# EAGLE board master_schematic_basic4 (EAGLE 7.2.0)
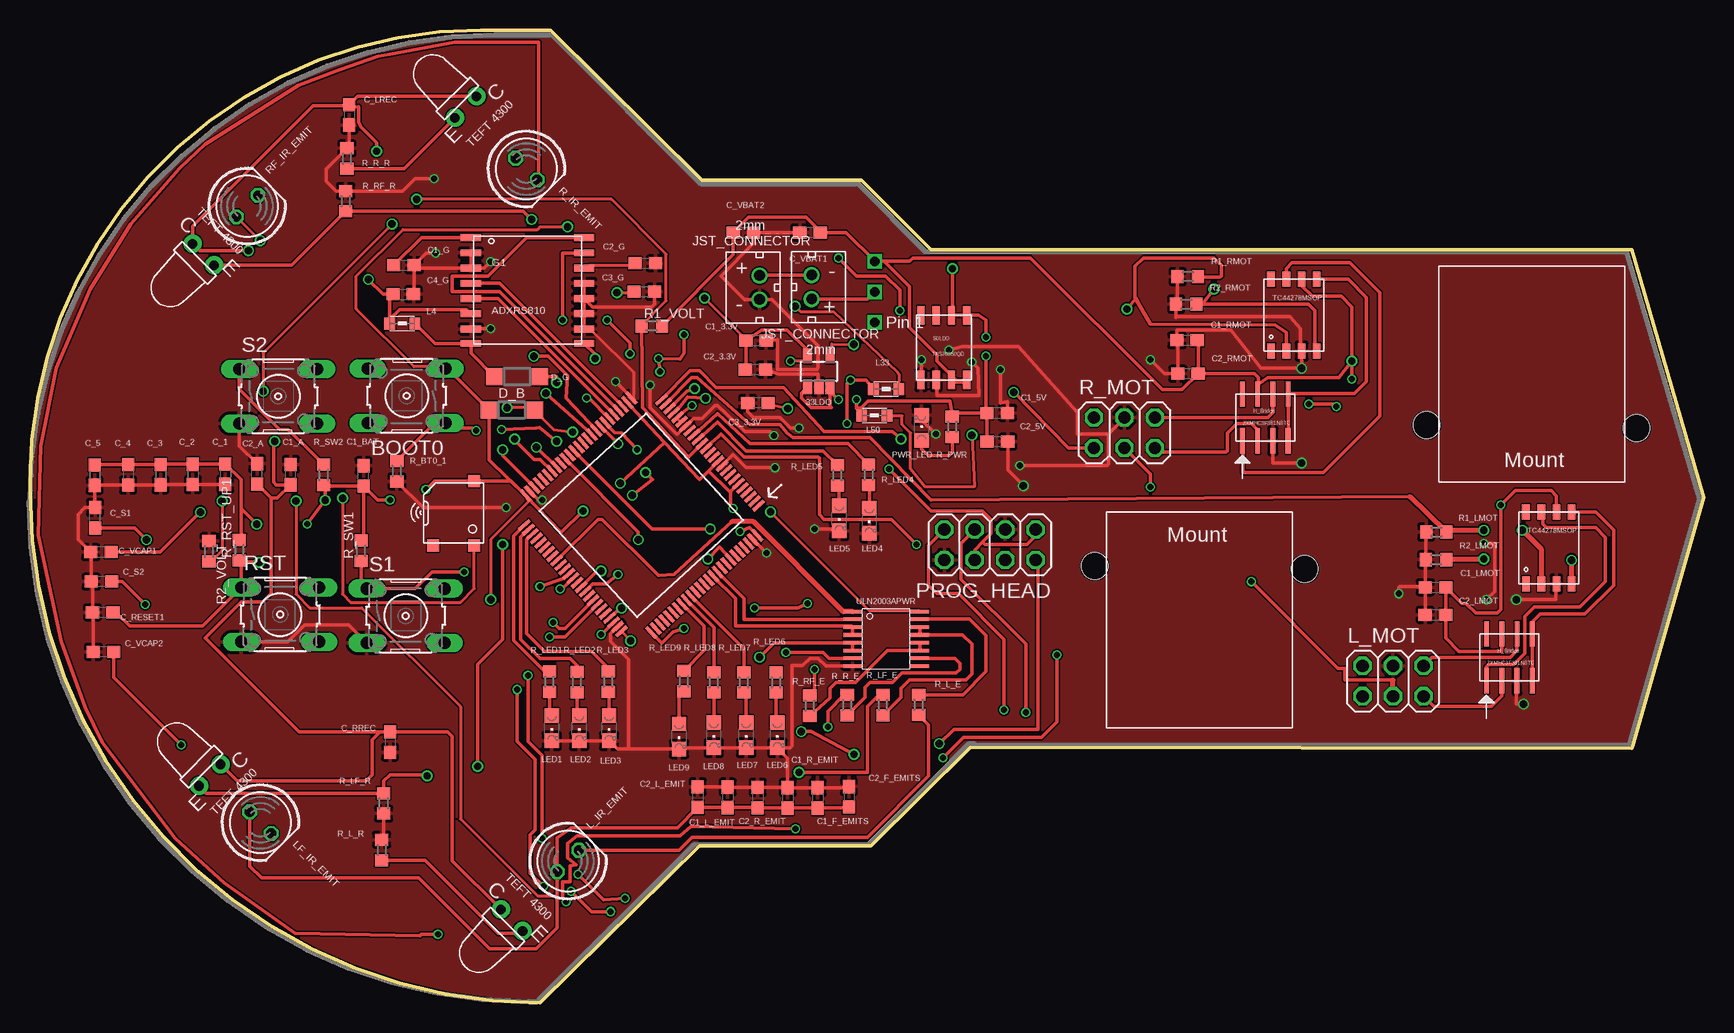
[diagram p0: board, top side]
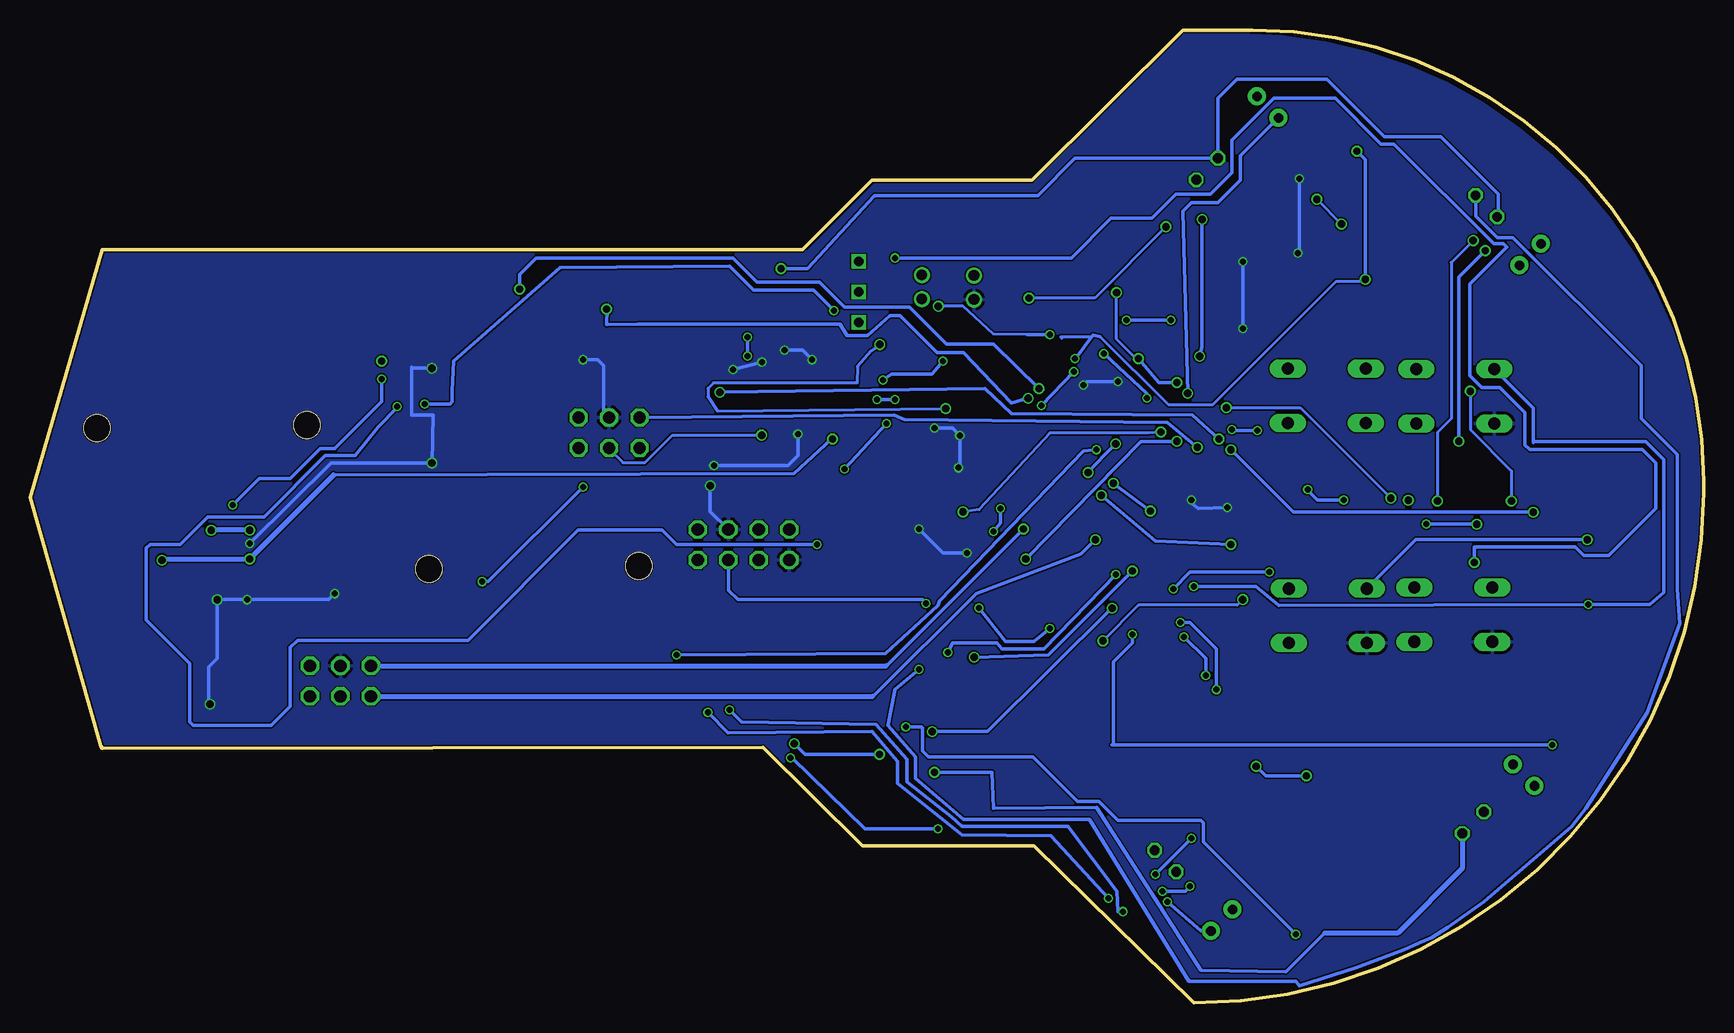
[diagram p1: board, bottom side, seen from below]

Size 139.5 x 81.1 mm. Coordinates in mm from the lower left corner, seen from the top.
Outline: 0,43.5 arc-90 37.6,81.1 43.4,81.1 56,68.6
Outline: 56.1,68.6 69.3,68.6 75.1,62.8 133.5,62.8 139.5,42.1 133.6,21.4 133.5,21.2 78.4,21.3 70.1,13.1 55.8,13.1 42.5,0 arc-90 0,42.5 0,43.6
Copper layers (1*16): Top 0.035mm / dielectric 1.5mm / Bottom 0.035mm
Design rules "default *": minimum track width 10mil, minimum drill 24mil, track to track 5mil, track to pad 5mil, pad to pad 5mil, via to via 5mil, smd to smd 5mil, copper to edge 5mil, drill to drill 5mil, minimum pad ring 5mil, minimum via ring 5mil, stop-mask expansion 4mil, vias tented up to drill 5mil, thermal gap 10mil

## Footprints (pad centres in the part's own frame; a part is rotated, then mirrored left to right if it is on the bottom)
SOT23-DBV = smd 0.75 x 1.2: 1 -0.95,-1.3; 2 0,-1.3; 3 0.95,-1.3; 4 0.95,1.3; 5 -0.95,1.3
8-SOIC(SMT) = smd 0.6 x 1.55: EN -0.635,-2.7; GND -1.905,-2.7; IN1 0.635,-2.7; IN2 1.905,-2.7; NC -0.635,2.7; OUT1 1.905,2.7; OUT2 0.635,2.7; PG -1.905,2.7
B3F-10XX = drill 1.016 long: 1 -3.251,2.261; 2 3.251,2.261; 3 -3.251,-2.261; 4 3.251,-2.261
C0603 = smd 1.1 x 1: 1 -0.85,0; 2 0.85,0
SOD123 = smd 1.4 x 1.4: A 1.9,0; C -1.9,0
SOIC-16 = smd 1.691 x 0.572: 1 -4.72,4.39; 2 -4.72,3.12; 3 -4.72,1.85; 4 -4.72,0.58; 5 -4.72,-0.69; 6 -4.72,-1.96; 7 -4.72,-3.23; 8 -4.72,-4.43; 9 4.72,-4.43; 10 4.72,-3.23; 11 4.72,-1.96; 12 4.72,-0.69; 13 4.72,0.58; 14 4.72,1.85; 15 4.72,3.12; 16 4.72,4.39
8-SOIC = smd 0.4 x 2.1: N1D/P1D -0.635,-1.95; N1G -1.905,-1.95; N2D/P2D 0.635,1.95; P1G -1.905,1.95; P1S/PS2 -0.635,1.95; P2G 1.905,1.95 | smd 0.42 x 2.1: N1S/N2S 0.635,-1.95; N2G 1.905,-1.95
WE-MI_0805 = smd 0.9 x 1: 1 -1.05,0; 2 1.05,0
LED5MM = drill 0.813 octagon: A -1.27,0; K 1.27,0
2X03 = drill 1.016 octagon: 1 -2.54,-1.27; 2 -2.54,1.27; 3 0,-1.27; 4 0,1.27; 5 2.54,-1.27; 6 2.54,1.27
RECEIVER = drill 0.8 pad 1.5: C 1.27,-0.5; E -1.27,-0.5
CHIPLED_0805 = smd 1.2 x 1.2: A 0,-1.05; C 0,1.05
TC44278MSOP = smd 0.635 x 1.27: GND 0.635,-3; IN_A -0.635,-3; IN_B 1.905,-3; NC1 -1.905,-3; OUT_A -0.635,3; OUT_B 1.905,3; VDD 0.635,3 | smd 0.66 x 1.27: NC2 -1.905,3
2X04 = drill 1.016 octagon: 1 -3.81,-1.27; 2 -3.81,1.27; 3 -1.27,-1.27; 4 -1.27,1.27; 5 1.27,-1.27; 6 1.27,1.27; 7 3.81,-1.27; 8 3.81,1.27
T212031 = drill 0.8 square: 1 0,2.54; 2 0,0; 3 0,-2.54
R0603 = smd 1 x 1.1: 1 -0.85,0; 2 0.85,0
SMT-0540-S-R = smd 1 x 1: + 1.7,-2.7; - 1.7,2.7; M -1.7,-2.7
BAT_FOOTPRINT = hole 2.2: -14,9.25; 14,9.25; 13.9,1; -14.15,1; 0,9.5; 0,1
MOTOR_MOUNT = hole 2.2: -9,4.25; 8.5,4
LQFP100 = smd 1.2 x 0.3: 1 -7.75,6; 2 -7.75,5.5; 3 -7.75,5; 4 -7.75,4.5; 5 -7.75,4; 6 -7.75,3.5; 7 -7.75,3; 8 -7.75,2.5; 9 -7.75,2; 10 -7.75,1.5; 11 -7.75,1; 12 -7.75,0.5; 13 -7.75,0; 14 -7.75,-0.5; 15 -7.75,-1; 16 -7.75,-1.5; 17 -7.75,-2; 18 -7.75,-2.5; 19 -7.75,-3; 20 -7.75,-3.5; 21 -7.75,-4; 22 -7.75,-4.5; 23 -7.75,-5; 24 -7.75,-5.5; 25 -7.75,-6; 51 7.75,-6; 52 7.75,-5.5; 53 7.75,-5; 54 7.75,-4.5; 55 7.75,-4; 56 7.75,-3.5; 57 7.75,-3; 58 7.75,-2.5; 59 7.75,-2; 60 7.75,-1.5; 61 7.75,-1; 62 7.75,-0.5; 63 7.75,0; 64 7.75,0.5; 65 7.75,1; 66 7.75,1.5; 67 7.75,2; 68 7.75,2.5; 69 7.75,3; 70 7.75,3.5; 71 7.75,4; 72 7.75,4.5; 73 7.75,5; 74 7.75,5.5; 75 7.75,6 | smd 0.3 x 1.2: 26 -6,-7.75; 27 -5.5,-7.75; 28 -5,-7.75; 29 -4.5,-7.75; 30 -4,-7.75; 31 -3.5,-7.75; 32 -3,-7.75; 33 -2.5,-7.75; 34 -2,-7.75; 35 -1.5,-7.75; 36 -1,-7.75; 37 -0.5,-7.75; 38 0,-7.75; 39 0.5,-7.75; 40 1,-7.75; 41 1.5,-7.75; 42 2,-7.75; 43 2.5,-7.75; 44 3,-7.75; 45 3.5,-7.75; 46 4,-7.75; 47 4.5,-7.75; 48 5,-7.75; 49 5.5,-7.75; 50 6,-7.75; 76 6,7.75; 77 5.5,7.75; 78 5,7.75; 79 4.5,7.75; 80 4,7.75; 81 3.5,7.75; 82 3,7.75; 83 2.5,7.75; 84 2,7.75; 85 1.5,7.75; 86 1,7.75; 87 0.5,7.75; 88 0,7.75; 89 -0.5,7.75; 90 -1,7.75; 91 -1.5,7.75; 92 -2,7.75; 93 -2.5,7.75; 94 -3,7.75; 95 -3.5,7.75; 96 -4,7.75; 97 -4.5,7.75; 98 -5,7.75; 99 -5.5,7.75; 100 -6,7.75
JST_CONNECTOR_FEMALE = drill 0.889: + 0,1; - 0,-1
ULN2003APWR = smd 1.55 x 0.3: 1B -2.8,2.275; 1C 2.8,2.275; 2B -2.8,1.625; 2C 2.8,1.625; 3B -2.8,0.975; 3C 2.8,0.975; 4B -2.8,0.325; 4C 2.8,0.325; 5B -2.8,-0.325; 5C 2.8,-0.325; 6B -2.8,-0.975; 6C 2.8,-0.975; 7B -2.8,-1.625; 7C 2.8,-1.625; COM 2.8,-2.275; GND -2.8,-2.275

## Placement (x,y rotation side)
33LDO  TPS73633DBVR  [SOT23-DBV]  65.75,52.64 0 top
50LDO  TPS76850QD  [8-SOIC(SMT)]  76.18,54.62 0 top
BOOT0  [B3F-10XX]  31.4,50.6 180 top
C1_3.3V  10uF  [C0603]  60.52,55.2 0 top
C1_5V  100uF  [C0603]  80.63,49.18 0 top
C1_A  1uF  [C0603]  21.74,44.03 90 top
C1_BAT  4.7uF  [C0603]  27.8,43.92 90 top
C1_F_EMITS  4.7uF  [C0603]  65.66,17.08 270 top
C1_G  1uF  [C0603]  31.17,61.48 0 top
C1_L_EMIT  4.7uF  [C0603]  58.16,17.12 270 top
C1_LMOT  100uF  [C0603]  117.17,34.64 0 top
C1_R_EMIT  4.7uF  [C0603]  63.16,17.08 270 top
C1_RMOT  100uF  [C0603]  96.45,55.24 0 top
C2_3.3V  .1uF  [C0603]  60.47,52.8 0 top
C2_5V  .1uF  [C0603]  80.65,46.78 0 top
C2_A  100nF  [C0603]  18.92,44.09 90 top
C2_F_EMITS  .1uF  [C0603]  68.26,17.17 270 top
C2_G  1uF  [C0603]  51.29,61.66 0 top
C2_L_EMIT  .1uF  [C0603]  55.66,17.14 270 top
C2_LMOT  .1uF  [C0603]  117.15,32.34 0 top
C2_R_EMIT  .1 uF  [C0603]  60.66,17.1 270 top
C2_RMOT  .1uF  [C0603]  96.53,52.44 0 top
C3_3.3V  100nF  [C0603]  60.68,50 180 top
C3_G  100nF  [C0603]  51.21,59.28 0 top
C4_G  1uF  [C0603]  31.11,59.06 0 top
C_1  100nF  [C0603]  16.28,44.07 270 top
C_2  100nF  [C0603]  13.58,44.05 270 top
C_3  100nF  [C0603]  10.88,44.03 270 top
C_4  100nF  [C0603]  8.18,44.01 270 top
C_5  100nF  [C0603]  5.38,43.99 270 top
C_LREC  0.1uF  [C0603]  26.62,74.03 270 top
C_RESET1  0.1 uF  [C0603]  6.06,32.54 180 top
C_RREC  0.1 uF  [C0603]  30.02,21.73 270 top
C_S1  0.1 uF  [C0603]  5.42,40.43 90 top
C_S2  0.1 uF  [C0603]  5.95,35.12 180 top
C_VBAT1  .1uF  [C0603]  65.02,64.22 180 top
C_VBAT2  100uF  [C0603]  59.47,64.22 0 top
C_VCAP1  2.2uF  [C0603]  5.91,37.56 180 top
C_VCAP2  2.2uF  [C0603]  6.13,29.26 180 top
D_B  25V  [SOD123]  40.15,49.41 0 top
D_G  >24V  [SOD123]  40.6,52.21 180 top
G1  ADXRS810  [SOIC-16]  41.47,59.4 0 top
HB_L  ZXMHC3F381N8TC  [8-SOIC]  123.32,28.8 0 top
HB_R  ZXMHC3F381N8TC  [8-SOIC]  102.97,48.8 0 top
L4  470uH  [WE-MI_0805]  31.04,56.64 0 top
L33  10uH  [WE-MI_0805]  71.36,51.16 0 top
L50  10uH  [WE-MI_0805]  70.38,48.96 0 top
L_IR_EMIT  5mm  [LED5MM]  44.85,11.81 45 top
L_MOT  [2X03]  113.62,26.82 0 top
L_REC  RECEIVER  [RECEIVER]  39.81,6.53 135 top
LED1  [CHIPLED_0805]  43.49,22.89 180 top
LED2  [CHIPLED_0805]  45.78,22.89 180 top
LED3  [CHIPLED_0805]  48.27,22.89 180 top
LED4  [CHIPLED_0805]  69.96,40.19 180 top
LED5  [CHIPLED_0805]  67.45,40.39 180 top
LED6  [CHIPLED_0805]  62.3,22.3 180 top
LED7  [CHIPLED_0805]  59.7,22.3 180 top
LED8  [CHIPLED_0805]  57,22.3 180 top
LED9  [CHIPLED_0805]  54.1,22.2 180 top
LF_IR_EMIT  5mm  [LED5MM]  19.21,15.01 315 top
LF_REC  RECEIVER  [RECEIVER]  14.63,19.33 45 top
MOS_L  TC44278MSOP  [TC44278MSOP]  126.61,37.92 0 top
MOS_R  TC44278MSOP  [TC44278MSOP]  105.36,57.32 0 top
PROG_HEAD  [2X04]  80.02,38.18 180 top
PWR_LED  [CHIPLED_0805]  74.32,47.94 0 top
PWR_SWITCH  T212031  [T212031]  70.43,59.28 180 top
R1_LMOT  47k  [R0603]  117.23,39.24 0 top
R1_RMOT  47k  [R0603]  96.51,60.54 0 top
R1_VOLT  20k  [R0603]  51.82,56.42 0 top
R2_LMOT  47k  [R0603]  117.21,36.94 0 top
R2_RMOT  47k  [R0603]  96.39,58.24 0 top
R2_VOLT  10k  [R0603]  14.92,37.63 270 top
R_BT0_1  47k  [R0603]  30.58,44.32 90 top
R_IR_EMIT  5mm  [LED5MM]  41.38,69.51 315 top
R_L_E  6 ohm  [R0603]  74.08,24.83 270 top
R_L_R  1.8k ohm  [R0603]  29.32,12.73 270 top
R_LED1  1k  [R0603]  43.3,26.77 90 top
R_LED2  1k  [R0603]  45.6,26.72 90 top
R_LED3  1k  [R0603]  48.2,26.77 90 top
R_LED4  1k  [R0603]  69.9,44.02 90 top
R_LED5  1k  [R0603]  67.3,43.97 90 top
R_LED6  1k  [R0603]  62.2,26.7 90 top
R_LED7  1k  [R0603]  59.5,26.7 90 top
R_LED8  1k  [R0603]  57,26.7 90 top
R_LED9  1k  [R0603]  54.5,26.8 90 top
R_LF_E  10 ohm  [R0603]  71.1,24.82 90 top
R_LF_R  1.8k ohm  [R0603]  29.48,16.62 90 top
R_MOT  [2X03]  91.23,47.52 0 top
R_PWR  200 Ohm  [R0603]  76.88,48.02 90 top
R_R_E  6 ohm  [R0603]  68.12,24.81 90 top
R_R_R  1.8k ohm  [R0603]  26.42,70.38 270 top
R_REC  RECEIVER  [RECEIVER]  35.97,75.03 45 top
R_RF_E  10 ohm  [R0603]  65,24.77 90 top
R_RF_R  1.8k ohm  [R0603]  26.32,66.83 270 top
R_RST_UP1  47k  [R0603]  17.44,37.74 90 top
R_SW1  47k  [R0603]  27.6,37.67 90 top
R_SW2  47k  [R0603]  24.48,44.01 270 top
RF_IR_EMIT  5mm  [LED5MM]  18.1,66.42 45 top
RF_REC  RECEIVER  [RECEIVER]  14.09,62.03 135 top
RST  [B3F-10XX]  20.85,32.36 0 top
S1  [B3F-10XX]  31.32,32.26 0 top
S2  [B3F-10XX]  20.69,50.56 0 top
SPK1  SMT-0540-S-R  [SMT-0540-S-R]  35.3,40.81 0 top
U$1  BAT  [BAT_FOOTPRINT]  -34.34,26.29 0 top  (outside the outline)
U$2  MOTOR  [MOTOR_MOUNT]  97.74,32.16 0 top
U$3  STM32F769VG-1  [LQFP100]  50.97,40.63 222.5 top
U$5  MOTOR  [MOTOR_MOUNT]  124.92,52.16 180 top
U$7  JST_CONNECTOR_FEMALE  [JST_CONNECTOR_FEMALE]  65.16,59.67 180 top
U$8  JST_CONNECTOR_FEMALE  [JST_CONNECTOR_FEMALE]  60.81,59.63 0 top
U$9  ULN2003APWR  [ULN2003APWR]  71.37,30.34 0 top

## Library data of the parts
33LDO = TPSRegulators; AVAILABILITY: Good; DESCRIPTION: Single Output LDO, 400mA, Adj.(1.2 to 5.5V), Cap free, Low Noise, Reverse Current Protection 5-SOT-23 -40 to 125; MF: Texas Instruments; MP: TPS73633DBVR; PACKAGE: SOT-23 Texas Instruments; PRICE: 1.34 USD
50LDO = TPSRegulators
BOOT0 RST S1 S2 = switch-omron; MPN: B3F-1000; OC_FARNELL: 176432; OC_NEWARK: 36M3542
C1_3.3V C1_5V C1_F_EMITS C1_L_EMIT C1_R_EMIT C2_3.3V C2_5V C2_F_EMITS C2_L_EMIT C2_R_EMIT C3_3.3V C_LREC C_RESET1 C_RREC C_S1 C_S2 C_VBAT1 C_VBAT2 R1_LMOT R1_RMOT R1_VOLT R2_LMOT R2_RMOT R2_VOLT R_BT0_1 R_L_E R_L_R R_LED1-R_LED9 R_LF_E R_LF_R R_PWR R_R_E R_R_R R_RF_E R_RF_R R_RST_UP1 R_SW1 R_SW2 = resistor
C1_A C1_BAT C1_G C1_LMOT C1_RMOT C2_A C2_G C2_LMOT C2_RMOT C3_G C4_G C_1-C_5 C_VCAP1 C_VCAP2 = rcl
D_B D_G = diode
G1 = gyroscope
HB_L HB_R = MMHbridge
L4 L33 L50 = EagleLibrary_Wuerth_Elektronik_eiSos_rev16a
L_IR_EMIT LED1-LED9 LF_IR_EMIT PWR_LED R_IR_EMIT RF_IR_EMIT = led
L_MOT PROG_HEAD R_MOT = pinhead
L_REC LF_REC R_REC RF_REC = sfh4550 & teft4300
MOS_L MOS_R = MMmosfet
PWR_SWITCH = GCswitch
SPK1 = SMT-0540-S-R; AVAILABILITY: Good; DESCRIPTION: Audio Indicator Transducer Electromagnetic 3Vp-p 100mA Solder Pad 2Vp-p 3500Hz to 4500Hz Surface Mount; MF: PUI Audio; MP: SMT-0540-S-R; PACKAGE: None; PRICE: 2.42 USD
U$1 U$2 U$5 = mounts
U$3 = MCU
U$7 U$8 = JST_CONNECTOR_FEMALE. through hole
U$9 = ULN2003APWR

## Nets
3.3V: 33LDO.5 BOOT0.3 C1_3.3V.1 C1_BAT.1 C2_3.3V.1 C_1.1 C_2.1 C_3.1 C_4.1 C_5.1 D_B.C L33.1 PROG_HEAD.1 PROG_HEAD.6 R_RST_UP1.2 R_SW1.2 R_SW2.2 SPK1.- U$3.6 U$3.11 U$3.27 U$3.50 U$3.75 U$3.100
5V: 33LDO.1 33LDO.3 50LDO.OUT1 50LDO.OUT2 C1_5V.1 C1_F_EMITS.2 C1_L_EMIT.2 C1_R_EMIT.2 C2_5V.1 C2_F_EMITS.2 C2_L_EMIT.2 C2_R_EMIT.2 L50.1 L_IR_EMIT.A LF_IR_EMIT.A R_IR_EMIT.A R_PWR.2 RF_IR_EMIT.A
A3.3V: C1_A.1 C2_A.1 C4_G.1 C_LREC.1 C_RREC.1 G1.6 L4.1 L33.2 L_REC.C LF_REC.C R_REC.C RF_REC.C U$3.20 U$3.21
A5.0V: L50.2 L_MOT.3 R_MOT.3
BOOT0: BOOT0.1 R_BT0_1.2 U$3.94
BUZZER: U$3.59 U$9.1B
G_CS: G1.4 U$3.28
G_MISO: G1.5 U$3.30
G_MOSI: G1.15 U$3.31
G_SCLK: G1.16 U$3.29
GND: 33LDO.2 50LDO.EN 50LDO.GND C1_3.3V.2 C1_5V.2 C1_A.2 C1_BAT.2 C1_F_EMITS.1 C1_G.2 C1_L_EMIT.1 C1_LMOT.1 C1_R_EMIT.1 C1_RMOT.1 C2_3.3V.2 C2_5V.2 C2_A.2 C2_F_EMITS.1 C2_G.2 C2_L_EMIT.1 C2_LMOT.1 C2_R_EMIT.1 C2_RMOT.1 C3_3.3V.2 C3_G.2 C4_G.2 C_1.2 C_2.2 C_3.2 C_4.2 C_5.2 C_LREC.2 C_RESET1.2 C_RREC.2 C_S1.2 C_S2.2 C_VBAT1.2 C_VBAT2.2 C_VCAP1.2 C_VCAP2.2 G1.2 G1.3 G1.7 G1.10 G1.11 G1.12 G1.13 HB_L.N1S/N2S HB_R.N1S/N2S L_MOT.4 LED1.C LED2.C LED3.C LED4.C LED5.C LED6.C LED7.C LED8.C LED9.C MOS_L.GND MOS_R.GND PROG_HEAD.3 PROG_HEAD.8 PWR_LED.C R1_LMOT.1 R1_RMOT.1 R2_LMOT.1 R2_RMOT.1 R2_VOLT.1 R_BT0_1.1 R_L_R.1 R_LF_R.1 R_MOT.4 R_R_R.1 R_RF_R.1 RST.3 S1.3 S2.3 U$3.10 U$3.19 U$3.26 U$3.49 U$3.74 U$3.99 U$8.- U$9.GND
L_EMITTER: U$3.65 U$9.5B U$9.6B
LED1: R_LED1.2 U$3.51
LED2: R_LED2.2 U$3.52
LED3: R_LED3.2 U$3.53
LED4: R_LED4.2 U$3.17
LED5: R_LED5.2 U$3.16
LED6: R_LED6.2
LED7: R_LED7.2 U$3.85
LED8: R_LED8.2 U$3.84
LED9: R_LED9.2 U$3.83
LEFT_REC: L_REC.E R_L_R.2 U$3.32
LENCA: L_MOT.1 U$3.41
LENCB: L_MOT.2 U$3.39
LF_EMITTER: U$3.66 U$9.7B
LF_REC: LF_REC.E R_LF_R.2 U$3.33
LPWMA: MOS_L.IN_A R1_LMOT.2 U$3.24
LPWMB: MOS_L.IN_B R2_LMOT.2 U$3.25
N$1: PWR_LED.A R_PWR.1
N$2: 33LDO.4 C3_3.3V.1
N$3: LED6.A R_LED6.1
N$4: R_L_E.1 U$9.2C
N$5: HB_L.N1G MOS_L.OUT_A
N$6: HB_L.N2G HB_L.P2G MOS_L.OUT_B
N$7: LED7.A R_LED7.1
N$8: HB_L.N1D/P1D L_MOT.5
N$9: U$7.- U$8.+
N$10: C1_G.1 G1.1
N$11: HB_L.N2D/P2D L_MOT.6
N$12: LED8.A R_LED8.1
N$13: R_R_E.1 U$9.7C
N$14: D_G.A G1.8 L4.2
N$15: LED9.A R_LED9.1
N$17: HB_R.N1G MOS_R.OUT_A
N$18: HB_R.N2G HB_R.P2G MOS_R.OUT_B
N$19: HB_R.N1D/P1D R_MOT.5
N$20: C3_G.1 D_G.C G1.9
N$21: HB_R.N2D/P2D R_MOT.6
N$23: R_RF_E.2 RF_IR_EMIT.K
N$24: R_LF_E.1 U$9.3C U$9.4C
N$25: R_IR_EMIT.K R_R_E.2
N$26: L_IR_EMIT.K R_L_E.2
N$27: R_RF_E.1 U$9.5C U$9.6C
N$28: LF_IR_EMIT.K R_LF_E.2
N$29: D_B.A SPK1.+ U$9.1C
N$31: PWR_SWITCH.2 U$7.+
N$35: C2_G.1 G1.14
N$40: LED1.A R_LED1.1
N$41: LED2.A R_LED2.1
N$42: LED3.A R_LED3.1
N$43: LED4.A R_LED4.1
N$44: LED5.A R_LED5.1
N$56: C_VCAP2.1 U$3.73
N$57: C_VCAP1.1 U$3.48
R_EMITTER: U$3.90 U$9.3B U$9.4B
RENCA: R_MOT.1 U$3.44
RENCB: R_MOT.2 U$3.43
RESET: C_RESET1.1 R_RST_UP1.1 RST.1 U$3.14
RF_EMITTER: U$3.91 U$9.2B
RF_REC: R_RF_R.2 RF_REC.E U$3.34
RIGHT_REC: R_R_R.2 R_REC.E U$3.35
RPWMA: MOS_R.IN_A R1_RMOT.2 U$3.22
RPWMB: MOS_R.IN_B R2_RMOT.2 U$3.23
RX: PROG_HEAD.5 U$3.69
SW1: C_S1.1 R_SW1.1 S1.1 U$3.63
SW2: C_S2.1 R_SW2.1 S2.1 U$3.62
SWCLK: PROG_HEAD.4 U$3.76
SWDIO: PROG_HEAD.2 U$3.72
TX: PROG_HEAD.7 U$3.68
V_BAT: 50LDO.IN1 50LDO.IN2 C1_LMOT.2 C1_RMOT.2 C2_LMOT.2 C2_RMOT.2 C_VBAT1.1 C_VBAT2.1 HB_L.P1S/PS2 HB_R.P1S/PS2 MOS_L.VDD MOS_R.VDD PWR_SWITCH.3 R1_VOLT.2
VOLTMETER: R1_VOLT.1 R2_VOLT.2 U$3.15

## Tracks (layer width: path | path; a pad name or v marks a point on that pad's centre or on a via)
3.3V  (via drill 0.5, 0.6, 0.61)
  Top 0.254: v50.06,30.18 49.38,30.86 U$3.75 | v38.41,33.6 38.41,38.63 41.61,41.84 U$3.50 | v56.24,58.75 59.66,55.32 C1_3.3V.1 | v44.81,64.69 42.52,64.69 42.29,64.47 31.09,64.47 27.2,60.58 27.2,57.84 32.01,53.04 34.52,53.04 BOOT0.3
  Top 0.305: U$3.50 40.09,43.51 SPK1.- 33.71,43.51 v33,42.8 | U$3.50 38.25,45.25 D_B.C 34.8,52.86 BOOT0.3 | C_5.1 5.4,44.86 C_4.1 10.86,44.86 C_3.1 10.9,44.9 C_2.1 13.6,44.92 C_1.1 17.6,43.6 17.6,41.2 | C2_3.3V.1 59.67,52.55 C1_3.3V.1 60.97,56.1 63.1,56.1 64.8,54.4 33LDO.5 64.9,54.04 | 17.6,41.2 17.6,38.75 R_RST_UP1.2 | U$3.50 44.29,39.19 v46.1,41 | v49.2,43.3 52.9,46.7 | 17.6,41.2 v18.9,39.9 | C1_BAT.1 27.8,38.72 R_SW1.2 | C1_BAT.1 24.57,43.07 R_SW2.2 24.6,43.04 v24.6,41.9 v23.1,39.9 | U$3.27 50.54,49.26 52.9,46.7 | 52.9,46.7 55.8,43.6 56.23,44 56.57,44.34 | 56.57,44.34 U$3.11 | 64.9,54.04 64.9,54.1 | C1_BAT.1 28.97,41.9 v30,41.9 | PROG_HEAD.6 78.75,37.75 79.4,38.4 | 79.4,38.4 80.1,39.1 80.1,40.3 79.4,41 75.1,41 v71.6,44.5 | v68.1,48.3 68.1,51.6 v68.4,51.9 69.67,51.9 L33.1 | U$3.6 59.05,43.25 58.4,42.6 | 58.4,42.6 58.3,42.6 56.57,44.34 | 58.4,42.6 58.4,41.4 v58.6,41.2 | v59.2,39.3 60,39.6 U$3.100 | 64.9,54.04 64.94,53.54 v63.4,53.5 | PROG_HEAD.1 83.83,38.93 83.1,38.2 79.6,38.2 79.4,38.4
  Bottom 0.254: v50.06,30.18 47.09,33.15 38.86,33.15 v38.41,33.6 | v56.24,58.75 50.75,58.75 v44.81,64.69
  Bottom 0.305: v46.1,41 v49.2,43.3 | v18.9,39.9 v23.1,39.9 | v30,41.9 32.2,41.9 33,42.7 v33,42.8 | v71.6,44.5 v68.1,48.3 | v58.6,41.2 58.6,40 v59.2,39.3 | v63.4,53.5 64.3,52.4 67.7,52.4 v68.4,51.9
5V  (via drill 0.5, 0.6, 0.61)
  Top 0.254: 43.95,8.92 42.29,8.92 35.89,15.32 35.89,24.69 27.66,32.92 23.32,32.92 22.17,34.06 v22.17,41.84 | v19.2,63.55 17.37,65.38 RF_IR_EMIT.A
  Top 0.305: LF_IR_EMIT.A 18.31,11.39 19.3,10.4 32.4,10.4 38.3,4.5 42.2,4.5 43.95,6.25 43.95,8.92 L_IR_EMIT.A 43.95,13.75 45.1,14.6 53.97,14.6 C2_L_EMIT.2 58.14,16.29 C1_L_EMIT.2 60.64,16.27 C2_R_EMIT.2 63.14,16.25 C1_R_EMIT.2 C1_F_EMITS.2 68.17,16.23 C2_F_EMITS.2 | 79.7,49.46 C1_5V.1 | C1_5V.1 77.19,49.18 R_PWR.2 76.7,50.15 69.84,50.15 69.31,49.61 | C1_5V.1 79.78,46.8 C2_5V.1 | 69.31,49.61 L50.1 | v76.9,61.2 76.9,57.41 50LDO.OUT2 50LDO.OUT1 79.08,57.32 79.7,56.9 v79.7,55.5 | 33LDO.1 64.3,50.84 64.3,50.4 65.1,49.6 66.8,49.6 66.7,49.7 33LDO.3 66.7,50.9 v67.4,50.3 | v68.9,50.3 68.9,49.52 69.31,49.61 | v79.7,53.9 79.7,49.26 C1_5V.1
  Bottom 0.254: v22.17,41.84 22.17,47.55 21.03,48.69 21.03,61.72 v19.2,63.55
  Bottom 0.305: RF_IR_EMIT.A 17.1,65.62 17.1,67.4 21.9,72.2 26.6,72.2 31.4,77 38.9,77 40.48,75.42 R_IR_EMIT.A 52.39,70.41 55.5,67.3 69.1,67.3 74.7,61.2 v76.9,61.2 | v67.4,50.3 v68.9,50.3 | v79.7,55.5 v79.7,53.9
A3.3V  (via drill 0.5, 0.6, 0.61)
  Top 0.254: U$3.21 53.95,48.69 54.18,48.46 U$3.20 | v63.78,58.06 64.24,57.61 66.98,57.61 72.32,52.56 72.42,52.41 L33.2
  Top 0.305: L_REC.C 35.2,11.85 35.2,22.2 34.82,22.58 C_RREC.1 29.18,22.58 | LF_REC.C 17.26,18.5 28,18.5 28.5,19 28.5,21.9 29.18,22.58 | R_REC.C 27.31,75.57 C_LREC.1 26.54,74.8 | 26.54,74.8 23.6,74.8 13.55,64.75 RF_REC.C 14.13,62.7 v18.2,62.7 | 26.54,74.8 26.7,74.64 27.4,74.7 27.4,73.4 27.6,73 28.9,71.7 v28.9,71 | G1.6 36.39,57.8 30.8,57.8 29.99,56.99 L4.1 29.99,58.79 C4_G.1 29.44,59.06 v28.2,60.3 | 29.18,22.58 22.42,22.58 14.6,30.4 17.6,33.4 19.4,33.4 20.1,34.1 20.1,42.06 | 20.1,42.06 C2_A.1 | 20.1,42.06 20.62,42.06 C1_A.1 20.52,43.18 20.3,43.4 20.3,46.7 v20.4,46.8 | U$3.21 54.41,49.22 v55.2,49.8 | v52.5,52.6 v52.4,53.7 54.2,53.65 54.5,54.15 v54.5,55.7
  Bottom 0.254: v63.78,58.06 61.72,58.06 59.21,55.75 56.4,55.7 | 50.9,55.65 51.05,55.5 53.6,55.5 53.5,55.4 | 50.29,55.55 44.58,49.84 40.92,49.84 30.63,60.12 28.35,60.12 v28.2,60.3
  Bottom 0.305: v28.2,60.3 28.2,70.3 v28.9,71 | v20.4,46.8 20.4,60.5 v18.2,62.7 | v55.2,49.8 v52.5,52.6 | 50.29,55.55 50.9,55.65 52.3,53.75 52.55,53.75 v52.4,53.7 | 56.4,55.7 v54.5,55.7
A5.0V  (via drill 0.5, 0.61)
  Top 0.254: v78.51,47.32 78.72,43.01 74.61,43.01 73.4,44.5 73.4,47.5 72.7,48.2 72.7,48.92 71.55,48.92 L50.2
  Top 0.305: 113.6,26.9 109.6,26.9 109.6,27.88 109.02,27.88 v101.8,35.1 | v93.4,43 93.4,44.08 R_MOT.3
  Top 0.406: L_MOT.3 113.62,26.88 113.6,26.9
  Bottom 0.254: v78.51,47.32 85.95,47.32 88.24,45.03 90.07,45.03 91.21,46.18 R_MOT.3
  Bottom 0.305: v101.8,35.1 101.3,35.1 v93.4,43
BOOT0  (via drill 0.5, 0.6)
  Top 0.305: R_BT0_1.2 33.75,48.34 BOOT0.1 35.09,47.9 36.9,47.9 v37.2,47.7 | v43.9,46.8 42.46,47.94 42.2,47.9 v39.3,47.8 | v56.5,37 57.46,38 U$3.94
  Bottom 0.305: v43.9,46.8 46.9,46.8 v56.5,37 | v37.2,47.7 39,47.7 v39.3,47.8
BUZZER
  Top 0.305: 58.5,40.1 53.7,35.7 52.4,35.6 47.7,40.3 47.34,40.3 U$3.59
  Top 0.406: U$9.1B 67.78,32.62 60.3,40.1 58.5,40.1
G_CS
  Top 0.305: G1.4 39.16,59.98 U$3.28
G_MISO
  Top 0.305: U$3.30 39.02,58.71 G1.5
G_MOSI  (via drill 0.5)
  Top 0.305: U$3.31 48.29,48.71 46.6,50.4 v46.4,50.4 | v50,54.1 50,55 v48.1,56.9 | v44.4,56.9 44.4,62.5 46.17,62.5 G1.15
  Bottom 0.305: v46.4,50.4 46.4,50.8 v50,54.1 | v48.1,56.9 v44.4,56.9
G_SCLK
  Top 0.305: U$3.29 39.14,59.3 35.2,59.3 35.2,60.6 38.2,60.6 41.39,63.79 G1.16
GND  (via drill 0.5, 0.6)
  Top 0.254: U$3.26 50.29,50.29 50.29,52.58 46.86,56.01 46.41,56.01 G1.10
  Top 0.305: C2_LMOT.1 116.3,34.62 C1_LMOT.1 | C1_LMOT.1 116.32,36.9 R2_LMOT.1 116.36,39.22 R1_LMOT.1 | R_L_R.1 29.48,13.74 R_LF_R.1 | C_VCAP2.2 5.28,32.47 C_RESET1.2 5.21,35.01 C_S2.2 5.1,37.52 C_VCAP1.2 4,38.62 4,40.7 4.58,41.28 C_S1.2 5.38,41.32 C_5.2 5.4,43.16 C_4.2 8.2,43.18 C_3.2 10.9,43.2 C_2.2 | C_2.2 13.6,43.22 C_1.2 | G1.13 G1.12 | G1.12 G1.11 G1.10 | G1.12 46.9,58 51.8,58 52.06,58.26 C3_G.2 | C_LREC.2 26.62,71.43 R_R_R.1 24.7,69.51 24.7,68.5 25.52,67.68 R_RF_R.1 31.08,67.68 32.1,68.7 v33.7,68.7 | C_2.2 13.5,43.28 13.5,43.3 | C2_A.2 17.44,46.42 S2.3 | C1_G.2 32.02,59.12 C4_G.2 | C1_G.2 32.25,61.25 G1.3 | G1.2 G1.3 | C2_L_EMIT.1 58.14,17.99 C1_L_EMIT.1 60.64,17.97 C2_R_EMIT.1 63.14,17.95 C1_R_EMIT.1 | C1_R_EMIT.1 C1_F_EMITS.1 68.17,17.93 C2_F_EMITS.1 | C1_R_EMIT.1 63.16,20.39 LED6.C | LED6.C LED7.C LED8.C 54.2,21.25 LED9.C 49.9,21.15 | 49.9,21.15 48.96,21.15 LED3.C LED2.C LED1.C | U$3.74 48.4,30.77 48.4,30.1 49.9,28.6 49.9,21.15 | C_VBAT1.2 C_VBAT2.2 60.32,63.32 57.6,60.6 59.57,58.63 U$8.- 61.87,58.63 65.7,54.8 65.7,53 65.6,52.8 62.3,52.8 62.3,55.3 C1_3.3V.2 61.27,55.2 | C2_3.3V.2 62.4,52.4 65.7,52.4 65.7,51.39 33LDO.2 | 95.94,60.62 R1_RMOT.1 95.66,57.82 95.54,57.7 | RST.3 21.5,30.1 22.9,31.5 26.57,31.5 S1.3 | LED6.C 63.35,21.25 63.5,21.4 63.5,28.1 64.4,28.1 65,28.7 65.7,28.7 66.33,28.06 U$9.GND | MOS_L.GND 127.2,34.88 127.2,33.6 v123.9,33.6 | v124.5,24.9 123.9,24.9 123.9,26.8 HB_L.N1S/N2S | v106,45 103.6,45 HB_R.N1S/N2S | v82.8,43.1 81.5,44.4 C2_5V.2 | 74.1,51.9 74.25,51.9 50LDO.GND 74.3,51.95 v74.3,53.6 | U$3.99 v61.4,37.5 | R_BT0_1.1 32.75,41.3 v39.7,41.3 | v42.7,41.9 42.3,42 41.77,42.53 U$3.49
  Top 0.305: 57.7,44.7 U$3.10 58.54,45.6 58.6,45.7 59.7,44.6 v62.1,44.6 | 50LDO.EN 75.6,51.87 75.6,50.6 79.1,50.6 79,52.9 v78.5,53.4 | v80.9,52.8 80.9,50 81.48,50.12 C1_5V.2 | v76.6,54.4 77.7,54.7 82.4,54.7 87.3,49.2 87.3,47.4 89.9,47.4 | 89.9,47.4 89.9,44.9 89.8,44.8 v82.5,44.8 | v75.5,47.4 74.32,48.58 PWR_LED.C | v114.1,34.1 114.1,34.6 114.2,34.7 116.26,34.7 C1_LMOT.1 | v121.2,38.3 122.1,38.3 122.1,34.3 v121.4,33.6 | R2_RMOT.1 95.54,57.7 | 95.54,57.7 95.54,57.14 95.5,57.2 105,57.2 105.9,56.2 105.9,54.41 MOS_R.GND v106,52.9 102.6,52.9 100.1,56.1 95.6,56.1 C1_RMOT.1 95.68,55.16 C2_RMOT.1 94.56,52.44 v93.4,53.6 | R_MOT.4 91.23,48.73 89.9,47.4 | v65.4,39.5 67.29,39.5 LED5.C | v33.8,62.5 33.04,62.5 C1_G.2 | v62,47.3 61.7,47.6 59.6,47.6 57.3,49.8 57.1,49.8 56,48.7 55.3,48.7 54.68,48.08 U$3.19 53.98,47.4 53.9,47.4 51.7,49.6 v51.7,51.5 | C3_3.3V.2 59.83,49.27 60.3,48.8 62.5,48.8 63.4,47.9 v64.1,47.9 | 50.29,50.29 50.29,50.31 v48.8,51.8 | G1.3 37.85,61.25 v38.4,61.8 | v38.4,56.2 36.78,56.2 G1.7
  Bottom 0.305: v124.5,24.9 124.6,25 124.6,28 123.9,28.7 v123.9,33.6 v121.4,33.6 114.6,33.6 v114.1,34.1 | v106,52.9 107.6,52.9 107.7,53 107.7,49 105.9,49 v106,45 114.4,45 v121.2,38.3 | PROG_HEAD.3 82.8,40.96 v82.8,43.1 | v39.7,41.3 42.1,41.2 42.9,41.8 v42.7,41.9 | v78.5,53.4 v80.9,52.8 | v74.3,53.6 75.1,54.4 v76.6,54.4 | v82.5,44.8 76.3,44.8 75.5,45.6 v75.5,47.4 | v93.4,53.6 92.2,53.6 91.7,53.1 91.7,49.26 R_MOT.4 | v61.4,37.5 63.4,37.5 v65.4,39.5 | v33.7,68.7 33.7,62.6 v33.8,62.5 | v62.1,44.6 62,44.7 v62,47.3 62.6,47.9 v64.1,47.9 | v48.8,51.8 51.4,51.8 v51.7,51.5 | v38.4,61.8 v38.4,56.2
  pour Bottom: 0,42 arc-90 38.7,80.7 43.4,80.7 55.9,68.3 69,68.3 74.7,62.6 133.2,62.6 139.2,42 133.3,21.5 78.2,21.5 69.9,13.2 55.5,13.2 42.3,0.1 41.9,0.1 arc-90
  pour Top: 0.1,42 arc-90 38.8,80.7 43.5,80.7 56,68.3 69.1,68.3 74.8,62.6 133.3,62.6 139.3,42 133.4,21.5 78.3,21.5 70,13.2 55.6,13.2 42.4,0.1 42,0.1 arc-90
L_EMITTER  (via drill 0.6)
  Top 0.305: U$9.6B U$9.5B 62.02,30.02 v60.8,28.8 | v47.6,36 47.08,35.8 U$3.65
  Bottom 0.305: v60.8,28.8 54.6,29 v47.6,36
LED1
  Top 0.305: U$3.51 40.3,38.91 40.3,30.2 42.88,27.62 R_LED1.2
LED2
  Top 0.305: 45.6,27.9 R_LED2.2 45.6,28.1 45,28.7 42.5,28.7 40.9,30.3 40.9,38.81 U$3.52
LED3
  Top 0.305: U$3.53 41.4,38.6 41.4,30.8 42.9,29.3 46.8,29.3 48.2,27.9 R_LED3.2
LED4
  Top 0.305: R_LED4.2 68.17,46.6 60,46.6 57.3,49.1 U$3.17
LED5
  Top 0.305: U$3.16 57.3,48.4 59.7,46 66.12,46 R_LED5.2
LED7
  Top 0.305: R_LED7.2 59.5,29.5 U$3.85
LED8
  Top 0.305: R_LED8.2 57,31.3 U$3.84
LED9
  Top 0.305: R_LED9.2 56.2,29.35 56.2,31.4 54.37,33.23 U$3.83
LEFT_REC  (via drill 0.5)
  Top 0.305: R_L_R.2 32.92,11.88 39,5.8 40.88,5.8 L_REC.E | U$3.32 48.75,47.55 49.3,47.5 v50.6,46.1 | v85.6,29 85.6,23.4 84.3,22.1 77.8,22.1 v76.1,20.4 | v63.8,14.5 55.1,14.7 54.2,13.9 45.6,13.9 44.8,13.3 44.8,12.1 45.5,11.5 45,11.4 45,10.1 44.4,10.1 44.4,8.8 v44.7,8.4
  Bottom 0.305: v50.6,46.1 51.7,46 63.7,33.5 63.8,33.1 68.2,29.1 v85.6,29 | v76.1,20.4 76,20.4 69.9,14.5 v63.8,14.5 | L_REC.E 41.89,5.99 v44.7,8.4
LENCA  (via drill 0.6)
  Top 0.305: v50.7,38.6 50.7,39.26 U$3.41
  Bottom 0.305: 69.25,25.55 60.6,34.1 51.9,37.4 v50.7,38.6
  Bottom 0.406: L_MOT.1 69.25,25.55
LENCB  (via drill 0.6)
  Top 0.305: v56.7,39.5 51.87,39.5 U$3.39
  Bottom 0.305: 68.11,28.09 v56.7,39.5
  Bottom 0.406: L_MOT.2 68.11,28.09
LF_EMITTER  (via drill 0.5)
  Top 0.305: U$9.7B 68.55,28.7 66.6,28.7 66.1,29.2 v63,29.2 | v49,35.7 48,34.9 46.9,34.9 46.29,34.29 U$3.66
  Bottom 0.305: v63,29.2 62.6,30 58.9,30 58.5,29.5 55,29.5 v49,35.7
LF_REC  (via drill 0.6)
  Top 0.305: v33.1,18.9 33,19 30,19 29.48,18.48 R_LF_R.2 14.69,17.47 LF_REC.E | v37.3,19.7 37.3,28.2 39.4,30.3 v39.4,38.2 | v50.2,42.3 51.9,43.6 v51.3,44.2 | v49,46.6 48.5,47.11 U$3.33
  Bottom 0.305: v33.1,18.9 36.5,18.9 v37.3,19.7 | v39.4,38.2 45.7,38.5 v50.2,42.3 | v51.3,44.2 49.9,45.7 v49,46.6
LPWMA  (via drill 0.6)
  Top 0.305: 115.02,42.2 75.1,41.9 70,47.1 63.6,47.1 63.1,47.5 62.5,48.2 60,48.2 55.6,52.1 55.15,52.1 U$3.24
  Top 0.406: v121.2,39.4 118.24,39.4 R1_LMOT.2 115.02,42.2 | v124.4,39.4 125.97,37.83 MOS_L.IN_A
  Bottom 0.406: v121.2,39.4 v124.4,39.4
LPWMB  (via drill 0.6)
  Top 0.305: U$3.25 55.04,52.7 55.8,52.7 57.2,51.3 62.8,51.3 66.2,47.6 71.9,47.6 v72.6,47
  Top 0.406: MOS_L.IN_B 128.5,34.94 v128.5,36.9 | v121.2,37 121.14,36.94 R2_LMOT.2
  Bottom 0.305: 72.7,47 75.8,44.1 114.2,44
  Bottom 0.406: v128.5,36.9 128.4,37 v121.2,37 114.2,44 | v72.6,47 72.7,47
N$1
  Top 0.305: PWR_LED.A 74.32,46.18 74.9,45.6 76.6,45.6 76.9,45.9 76.9,47.15 R_PWR.1
N$2  (via drill 0.61)
  Top 0.254: v63.17,49.54 61.72,49.84 C3_3.3V.1 | v68.67,54.88 66.82,54.92 33LDO.4
  Bottom 0.254: v63.17,49.54 82.2,49.34 82.98,50.52 82.98,51.21 82.52,51.66 70.55,51.66 70.52,53.04 69.41,54.34 v68.67,54.88
N$3
  Top 0.305: R_LED6.1 62.2,23.45 LED6.A
N$4
  Top 0.305: R_L_E.1 77.78,25.68 79.7,27.6 79.7,30.6 78.3,32 74.2,32 U$9.2C
N$5
  Top 0.305: HB_L.N1G 121.41,28.02 121.6,28.2 123.7,28.2 124.6,29.1 124.6,32.2 125.4,33 129.2,33 131.3,35.1 131.3,38.8 130.5,39.6 126.4,39.6 126.1,39.9 126.1,40.8 MOS_L.OUT_A
N$6
  Top 0.305: HB_L.N2G HB_L.P2G 125.22,31.73 125.9,32.4 129.6,32.4 132,34.8 132,39.4 130.5,40.9 128.53,40.9 MOS_L.OUT_B
N$7
  Top 0.305: LED7.A 59.7,25.65 R_LED7.1
N$8
  Top 0.305: HB_L.N1D/P1D 122.69,25.59 121.8,24.7 117.01,24.7 L_MOT.5
N$9
  Top 0.305: U$8.+ 60.85,60.67 U$7.-
N$10
  Top 0.305: G1.1 32.63,63.79 C1_G.1
N$11
  Top 0.305: HB_L.N2D/P2D 123.95,29.35 123.4,28.8 116.87,28.8 L_MOT.6
N$12
  Top 0.305: LED8.A R_LED8.1
N$13
  Top 0.305: U$9.7C 77.08,28.72 77.5,28.3 77.5,27.8 77.2,27.5 72.7,27.5 71.9,26.7 70,26.7 69.6,26.3 69.6,25.44 R_R_E.1
N$14
  Top 0.305: L4.2 33.76,54.97 G1.8 36.75,54.16 D_G.A
N$15
  Top 0.305: LED9.A 54.1,25.55 R_LED9.1
N$17
  Top 0.305: MOS_R.OUT_A 104.72,61.22 105.2,61.7 110,61.7 112.5,59.2 112.5,48.9 107.8,44.2 101.1,44.2 101.1,46.81 HB_R.N1G
N$18
  Top 0.305: MOS_R.OUT_B 109.88,60.32 111.4,58.8 111.4,51.8 110.4,50.8 104.92,50.8 HB_R.P2G HB_R.N2G
N$19
  Top 0.305: HB_R.N1D/P1D 102.33,47.77 101.8,48.3 100.6,48.3 99.8,47.5 99.8,46 99.7,45.9 94.12,45.9 R_MOT.5
N$20  (via drill 0.6, 0.61)
  Top 0.254: v48.92,59.21 50.29,59.21 C3_G.1
  Top 0.305: D_G.C 43.89,52.21 v43.9,51.7 | v47.1,53.7 47.1,54.06 G1.9
  Bottom 0.254: v48.92,59.21 48.92,55.32 47.32,53.72 v47.1,53.7
  Bottom 0.305: v43.9,51.7 45.4,51.7 v47.1,53.7
N$21
  Top 0.305: R_MOT.6 103.19,48.79 103.6,49.2 HB_R.N2D/P2D
N$23  (via drill 0.5)
  Top 0.305: v65.4,27.8 65.4,25.82 R_RF_E.2
  Bottom 0.305: RF_IR_EMIT.K 19,65.6 17.2,63.8 15.9,63.8 5.2,53.1 5.2,48.7 2.2,45.7 2.2,34.5 2,31.6 4.7,24.2 9.8,16.2 11,14.7 18.3,8.4 21.3,6.3 22.7,5.4 23.7,5 25,4.4 29,2.9 33.7,1.4 34,1.8 42.9,1.8 51.2,15.3 61.7,15.3 65.7,18.7 65.7,20.5 68,23.1 67.4,26.1 v65.4,27.8
N$24
  Top 0.305: U$9.3C U$9.4C 77.73,30.66 78.5,29.9 78.5,27.4 78,26.9 73.3,26.9 72.6,26.2 72.6,25.47 R_LF_E.1
N$25  (via drill 0.5)
  Top 0.305: R_IR_EMIT.K 42.4,68.73 42.4,80.1 35.4,80.1 30,79.1 29,78.9 25.8,77.8 22.4,76.5 14.6,71.6 12.5,69.6 8.4,64.9 5,59.5 2.2,52.9 0.9,46.4 0.7,39 2.6,30.1 4.6,24.6 6,21.7 12.1,13.7 16.2,10 22.1,5.8 32.5,5.6 32.6,5.7 v34,5.7 | v66.5,23 66.5,24.3 67.86,25.66 R_R_E.2
  Bottom 0.305: v34,5.7 41.7,13.4 41.7,15 41.9,15.2 48.8,15.2 50.4,16.8 52.2,16.8 55.9,20.5 64.6,20.5 65.1,21 65.1,22.9 65.2,23 v66.5,23
N$26
  Top 0.305: L_IR_EMIT.K 54.11,12.71 55.2,13.8 69.8,13.8 74.9,18.9 74.9,23.16 R_L_E.2
N$27
  Top 0.305: U$9.5C U$9.6C 71.46,29.37 68.8,26.7 67.2,26.7 66.7,26.2 66.7,25.42 R_RF_E.1
N$28  (via drill 0.6)
  Top 0.305: v64.1,19.2 69.8,19.2 69.8,24.7 70.77,25.67
  Top 0.406: 70.77,25.67 R_LF_E.2
  Bottom 0.305: 31.6,5.8 34.8,2.6 41.9,2.7 50.6,16.3 59.2,16.2 59.3,19.2 v64.1,19.2
  Bottom 0.406: LF_IR_EMIT.K 20.11,11.19 25.5,5.8 31.6,5.8
N$29  (via drill 0.61)
  Top 0.254: v26.06,42.06 26.06,34.06 26.75,33.38 35.89,33.38 37.03,34.52 37.03,37.95 SPK1.+ | v39.78,49.61 41.84,49.61 D_B.A 42.06,49.38 43.66,47.78 v45.23,47.58 | v61.72,40.92 69.95,32.69 74.07,32.69 U$9.1C
  Bottom 0.254: v26.06,42.06 33.61,49.61 v39.78,49.61 | v61.72,40.92 60.38,41.12 54.49,47.51 46.26,47.51 v45.23,47.58
N$31
  Top 0.305: U$7.+ 69.82,58.67 PWR_SWITCH.2
N$35
  Top 0.254: C2_G.1 50.29,61.49 46.63,61.49 46.41,61.27 G1.14
N$40
  Top 0.305: LED1.A 43.3,24.13 R_LED1.1
N$41
  Top 0.305: LED2.A 45.6,24.12 R_LED2.1
N$42
  Top 0.305: R_LED3.1 48.22,25.9 48.3,25.9 48.27,25.87 LED3.A
N$43
  Top 0.305: LED4.A 69.96,43.11 R_LED4.1
N$44
  Top 0.305: LED5.A 67.45,42.97 R_LED5.1
N$56  (via drill 0.5)
  Top 0.305: U$3.73 47.63,30.7 v47.6,30.7 | v12.6,21.5 6.98,27.12 C_VCAP2.1
  Bottom 0.305: v47.6,30.7 47.6,30 49.2,28.4 49.2,21.6 49.3,21.5 v12.6,21.5
N$57  (via drill 0.6)
  Top 0.305: C_VCAP1.1 10.86,37.56 v14.2,40.9 | v39.4,46.1 39.4,45.61 U$3.48
  Bottom 0.305: v14.2,40.9 34.2,40.9 v39.4,46.1
R_EMITTER
  Top 0.305: U$9.4B U$9.3B 68.48,31.4 58.8,31.4 58.8,33.7 56.94,35.56 U$3.90
RENCA  (via drill 0.6)
  Top 0.305: R_MOT.1 86.55,46.25 v82,50.9 | v40.4,47 40.4,46.9 42,45.3 42.54,45.3 U$3.44
  Bottom 0.305: v82,50.9 59.9,51.2 57.7,49.1 42.6,49 v40.4,47
RENCB  (via drill 0.6)
  Top 0.305: v42.2,46.3 43.35,45.2 U$3.43
  Bottom 0.305: R_MOT.2 88.58,48.8 67.5,49 66.8,48.7 66.6,48.6 44.69,48.39 v42.2,46.3
RESET  (via drill 0.5, 0.6)
  Top 0.305: 17.6,36.73 RST.1 14.38,31.4 8.3,31.4 7.16,32.54 C_RESET1.1 | 17.6,36.73 R_RST_UP1.1 | 17.6,36.73 19.07,36.73 v19.1,36.7 | v67.4,62.1 68.9,60.6 71.3,60.6 72.5,59.4 v72.5,57.7 | v73.9,38.2 71.8,40.3 66.2,40.3 65.8,40.7 65.8,45.4 65.7,45.5 59.5,45.5 57.6,47.4 57.4,47.2 56.53,46.43 U$3.14 | v106.6,49.9 108.7,49.9 v108.9,49.7
  Bottom 0.305: v19.1,36.7 19.1,38 10.7,38 10,37.3 7.9,37.3 4,41.2 4,45 5.1,46.1 14.5,46.1 14.9,46.5 14.9,49.2 17,51.3 18.5,51.3 19.5,52.3 19.5,59.9 16.4,63 16.7,63.3 17.5,63.3 25.8,71.6 26.9,71.6 30.7,75.4 35.8,75.4 39.3,71.9 39.3,69.2 41.1,67.4 44,67.4 46,65.4 49.4,65.4 52.7,62.1 v67.4,62.1 | v72.5,57.7 74.2,59.4 79.2,59.4 81.2,61.4 95.3,61.3 104.2,53.5 104.3,51 104.3,50.1 104.5,49.9 v106.6,49.9 | v73.9,38.2 85.6,38.2 86.8,39.4 93.8,39.4 103,30.2 117.2,30.2 117.8,29.6 117.8,24.7 119.4,23.1 125.9,23.1 126.2,23.4 126.2,28.3 129.8,31.9 129.8,37.9 129.5,38.2 127,38.2 124.7,40.5 120,40.5 114.9,45.6 112.4,45.6 110.5,48 108.9,49.6 v108.9,49.7
RF_EMITTER
  Top 0.305: U$9.2B 59.5,31.97 59.5,33.7 U$3.91
RF_REC  (via drill 0.6)
  Top 0.305: RF_REC.E 21.83,61.49 R_RF_R.2 41.12,65.98 v41.8,65.3 | v42,53.9 43.2,53.9 44.8,52.3 44.7,50.4 U$3.34
  Bottom 0.305: v41.8,65.3 41.8,54.7 v42,53.9
RIGHT_REC  (via drill 0.6)
  Top 0.305: R_REC.E 31.18,69.53 R_R_R.2 | U$3.35 46.44,47.76 v43,50.8
  Bottom 0.305: v43,50.8 43.4,66 42.7,66.7 40.5,66.7 38.6,68.6 38.6,70.6 R_REC.E
RPWMA  (via drill 0.6, 0.61)
  Top 0.254: 92.66,57.89 92.18,58.74 v91.44,57.84
  Top 0.305: MOS_R.IN_A 104.72,55.88 103.8,56.5 93.4,56.6 92.66,57.89 92.1,58.8 92.1,61.4 92.8,62.1 98.7,62.1 99.3,61.5 99.3,60.6 99.2,60.5 97.8,60.5 R1_RMOT.2 | U$3.22 53.68,49.18 54,49.5 54.5,50.1 54.8,50.5 v56.3,50.4
  Bottom 0.254: v91.44,57.84 91.44,56.54
  Bottom 0.305: v56.3,50.4 57.7,50 61.7,54.2 63.9,54.2 67,57.3 67.8,57.3 69.7,55.6 71.4,55.6 72,56.6 88.8,56.6 91.44,56.54 91.4,57.8
RPWMB  (via drill 0.6)
  Top 0.305: 97.74,58.24 106.56,58.24 107.1,57.7 107.1,54.48 MOS_R.IN_B | R2_RMOT.2 97.74,58.24 | 97.74,58.24 v98.7,59.5 | v55.4,51.2 54.75,51 U$3.23
  Bottom 0.305: v98.7,59.5 98.7,60.7 97.3,62.1 80.9,62.1 78.9,60.1 73.7,60.1 71.6,58 66.2,58 63.1,54.9 59.2,54.9 v55.4,51.2
RX  (via drill 0.5)
  Top 0.305: PROG_HEAD.5 77.6,38.3 77.6,35.3 83,29.9 v83,24.2 | v49.6,8.7 47.8,8.6 v45.7,10.7 | v42.7,13.7 42.7,20.6 41.5,21.8 v41.5,27.3 | v43.3,30.5 44.6,30.5 U$3.69
  Bottom 0.305: v83,24.2 81.3,22.5 69.3,22.6 67.2,20.1 67.2,18.3 61.8,14 54.4,13.9 v49.6,8.7 | v45.7,10.7 v42.7,13.7 | v41.5,27.3 41.5,28.7 v43.3,30.5
SW1  (via drill 0.5, 0.6)
  Top 0.305: R_SW1.1 27.6,34.99 S1.1 32.12,34.52 33.5,35.9 v36.2,35.9 | v44.2,34.5 44.36,34.5 U$3.63 | C_S1.1 8.72,39.58 v9.7,38.6
  Bottom 0.305: v36.2,35.9 42.8,35.9 v44.2,34.5 | v9.7,38.6 23.99,38.6 S1.1
SW2  (via drill 0.5)
  Top 0.305: S2.1 17.44,51.16 20.8,47.8 21.5,47.8 22.7,46.6 22.74,46.6 R_SW2.1 | U$3.62 44.46,35.36 v42.5,34.7 | C_S2.1 7.68,35.12 v9.6,33.2
  Bottom 0.305: v42.5,34.7 37.3,34.7 35.4,33.1 v9.6,33.2 4.5,33.2 3.3,34.2 3.3,45.3 4.8,46.8 14.1,46.8 14.2,46.7 14.2,49.58 S2.1
SWCLK  (via drill 0.5)
  Top 0.305: v64.8,33.3 64,32.9 v60.4,32.9 | v54.5,31.2 53.6,30.9 52.7,30 52.65,30 U$3.76
  Bottom 0.305: PROG_HEAD.4 81.29,34.39 80.5,33.6 65.1,33.6 v64.8,33.3 | v60.4,32.9 58.2,30.1 55.8,30.1 v54.5,31.2
SWDIO  (via drill 0.6)
  Top 0.305: PROG_HEAD.2 84,36.74 84,22.8 77,22.8 v75.8,21.6 | v68.7,20.7 65.1,22.6 v64.3,22.6 | v49.3,32.9 49.22,32.9 U$3.72
  Bottom 0.305: v75.8,21.6 74.9,20.7 v68.7,20.7 | v64.3,22.6 59.7,22.6 v49.3,32.9
TX  (via drill 0.5)
  Top 0.305: PROG_HEAD.7 74.9,38.14 74.9,34.8 75.6,34.1 77.4,34.1 81.2,30.3 v81.2,24.4 | U$3.68 44.6,31.2 44.1,31.2 v43.6,31.7 | v40.6,26.1 40.6,21.8 42.1,20.3 42.1,14.4 41.7,14 41.7,10.8 v42.8,9.7 | v45.1,9.3 46.8,7.6 v48.4,7.6
  Bottom 0.305: v81.2,24.4 80.2,23.4 69,23.2 66.4,20.3 66.4,18.4 62.7,15.5 61.8,14.7 53,14.7 48.9,9.3 48.8,7.6 v48.4,7.6 | v43.6,31.7 42.8,31.7 40.6,29.5 v40.6,26.1 | v42.8,9.7 43.2,9.3 v45.1,9.3
V_BAT  (via drill 0.5, 0.61)
  Top 0.254: v110.19,53.49 v110.2,53.49
  Top 0.305: HB_L.P1S/PS2 122.7,30.73 122.7,29.3 119.1,29.3 118,30.4 C2_LMOT.2 118.02,32.36 C1_LMOT.2 119.36,33.3 119.7,33.3 120.5,32.5 122.3,32.5 122.6,32.8 v122.6,41.5 123.8,42.7 126.8,42.7 127.25,42.26 MOS_L.VDD | PWR_SWITCH.3 68.03,64.22 C_VBAT1.1 65.87,64.33 64.7,65.5 59.9,65.5 C_VBAT2.1 58.62,62.37 R1_VOLT.2 | C2_RMOT.2 97.38,55.02 C1_RMOT.2 | MOS_R.VDD 105.99,59.81 106.9,58.9 109.3,58.9 110.2,58 v110.2,53.49 v110.2,52 | PWR_SWITCH.3 71.18,61.82 73.3,59.7 73.3,56.3 75.6,54 75.6,53.5 77.3,51.8 | C2_RMOT.2 96.04,51.1 94.4,51.1 83.4,62.1 73.6,62.1 73.32,61.82 PWR_SWITCH.3 | C2_RMOT.2 102.06,52.44 102.4,52.1 102.4,50.81 HB_R.P1S/PS2 102.33,51.53 103.2,52.1 109.09,52.1 v110.19,53.49
  Top 0.406: 50LDO.IN2 78.08,51.81 78.1,51.8 77.3,51.8 76.93,51.8 50LDO.IN1
  Bottom 0.305: v110.2,52 110.2,50.1 114.1,46.2 115.3,46.2 117.8,43.7 120.4,43.7 v122.6,41.5
VOLTMETER  (via drill 0.61)
  Top 0.254: v16,41.84 16,37.72 15.09,36.81 R2_VOLT.2 | v19.43,50.98 19.43,54.18 v30.18,64.92 | v32.23,66.98 48.46,66.98 53.04,62.41 53.04,58.52 50.98,56.47 R1_VOLT.1
  Top 0.305: R1_VOLT.1 51.07,49.63 54.9,45.5 55.41,46 U$3.15
  Bottom 0.254: v16,41.84 16,44.35 19.43,47.78 v19.43,50.98 | v32.23,66.98 v30.18,64.92